# Altium PCB USBtoUART R.PcbDoc
Units mil, origin at the board's own origin, x right, y up, seen from the top; angles counter-clockwise.
Board outline 2125.98 x 2401.57 mil, 2 copper layers (Top Layer, Bottom Layer); 22 components, 17 nets, 100 pads, 8 vias.
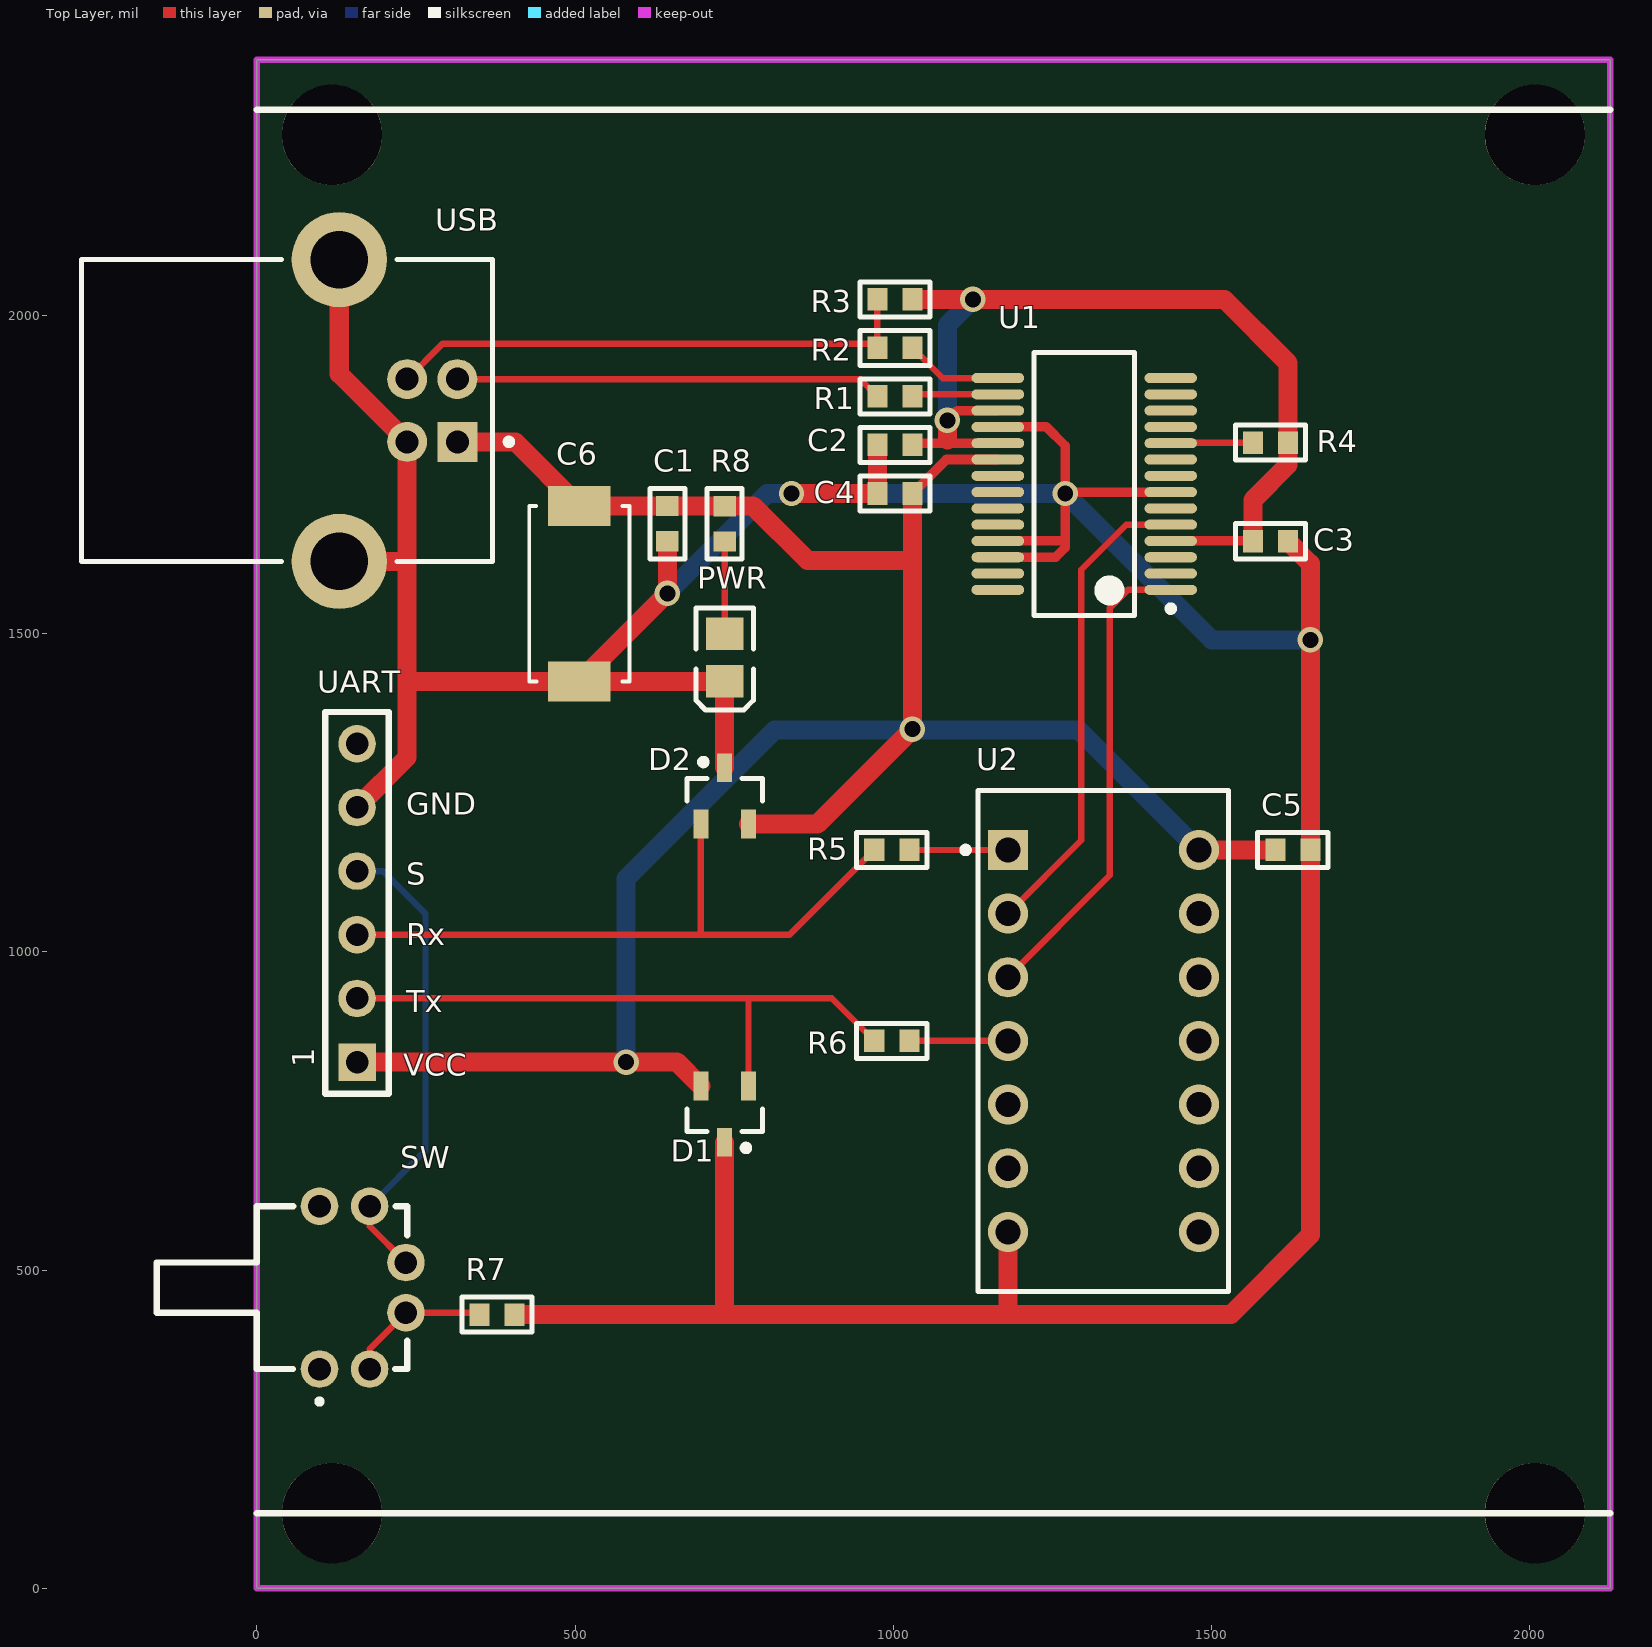
[diagram p0: Top Layer view]
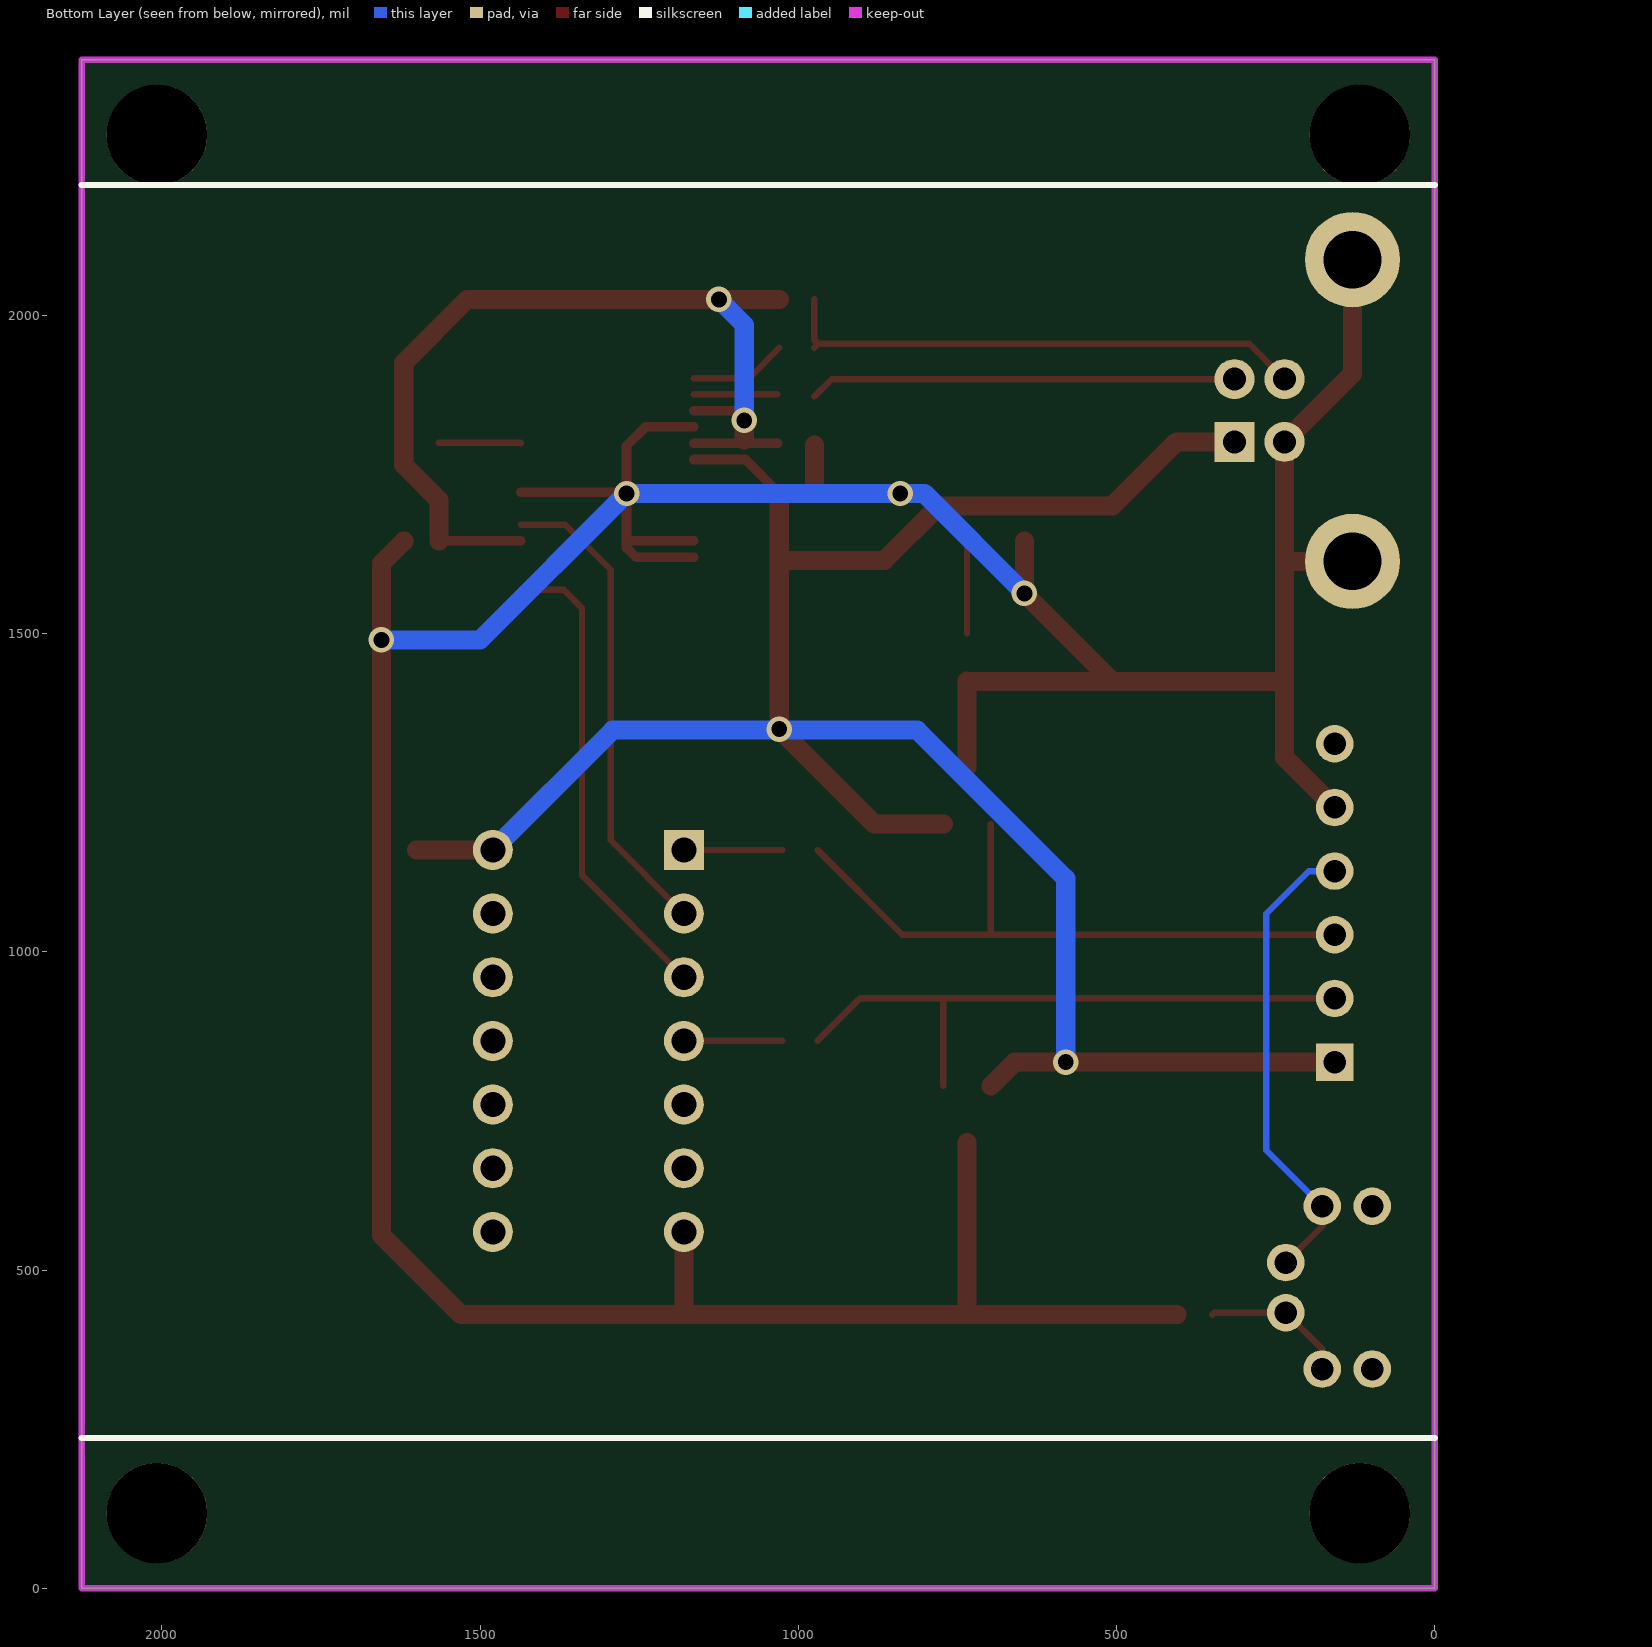
[diagram p1: Bottom Layer view, seen from below]

## Layer stack, top to bottom
Top Layer: signal copper 1.4
Dielectric: dielectric 12.6, FR-4, Dk 4.8
Bottom Layer: signal copper 1.4

## Board outline
0,0 0,2401.57 2125.98,2401.57 2125.98,0

## Design rules (kind name [scope] priority, off if disabled: settings)
Clearance [All] p1: gap=8
HoleSize [All] p1: absolutevalues=TRUE maxlimit=200 minlimit=1 maxpercent=80.000 minpercent=20.000
MinimumSolderMaskSliver [All] p1: minsoldermaskwidth=1
PolygonConnect [All] p1: connectstyle=Relief reliefconductorwidth=10 reliefentries=4 polygonreliefangle="90 Angle"
RoutingVias [All] p1: holewidth=28 width=50 viastyle="Through Hole" minholewidth=10 minwidth=20 maxholewidth=28 maxwidth=50
SilkToSilkClearance [All] p1: silktosilkclearance=5
SilkscreenOverComponentPads [All] p1: minsilkscreentomaskgap=0
SolderMaskExpansion [All] p1: expansion=4
Width [All] p1: maxlimit=100 minlimit=10 preferedwidth=10
24 further rules are at their usual default settings.

## Components (designator, comment, footprint, x,y, rotation, side; value= is the part's Value field where it differs from the comment)
C1 "0.1uF" 0603INCH_1608MM 645,1645 r90 top
C2 "0.1uF" 0603INCH_1608MM 974.88,1796.25 r0 top
C3 "0.1uF" 0603INCH_1608MM 1620,1645 r180 top
C4 "0.1uF" 0603INCH_1608MM 1030,1720 r180 top
C5 "0.1uF" 0603INCH_1608MM 1600,1160 r0 top
C6 "10uF" 7343-CAP 510,1575 r270 top
D1 "BAT64-04" SOT23_N 735,745 r270 top
D2 "BAT64-04" SOT23_N 735,1245 r90 top
PWR "LED" "LED 0805" 735,1500 r270 top
R1 "22R" 0603INCH_1608MM 1030,1872.5 r180 top
R2 "22R" 0603INCH_1608MM 1030,1948.75 r180 top
R3 "1.5K" 0603INCH_1608MM 974.88,2025 r0 top
R4 "4.7K" 0603INCH_1608MM 1620,1800 r180 top
R5 "22R" 0603INCH_1608MM 970,1160 r0 top
R6 "22R" 0603INCH_1608MM 970,860 r0 top
R7 "200R" 0603INCH_1608MM 405,430 r180 top
R8 "1K" 0603INCH_1608MM 735,1700 r270 top
SW "SW" SW_ZS 98.43,472.44 r90 top locked
U1 "PL2303HXD" SOP65P780-28BN 1300,1735 r180 top
U2 "SN74LS14N" PDIP_14PIN 1330,860 r0 top
UART "DP6" Pin6_2.54mm 157.48,826.77 r90 top locked
USB "USB" USB2.5-2H4D 275.59,1850.39 r180 top locked

## Footprints (in the part's own frame and the unit in brackets; to place one, negate y for a bottom-side part, rotate by r counter-clockwise, add the part's x,y. Pads: shape width x height; smd on the part's side, far side on the other; paste and mask are expansions set on the pad)
0603INCH_1608MM [mm]
  rect 0.8x0.9 smd: 1(0,0) 2(1.4,0)
  silkscreen extent -0.7,-0.7 2.1,0.7, body extent -0.03,-0.46 1.47,0.46, height 0.5
7343-CAP [mm]
  rect 1.6x2.5 smd: 1(-3.186,-0.083) 2(3.814,-0.083)
  silkscreen extent -3.19,-2.08 3.81,1.92
"LED 0805" [mm]
  rect 1.3x1.5 smd: A(0,0) K(1.905,0)
  silkscreen extent -1.02,-1.15 3.05,1.15, body extent -0.13,-0.76 2.03,0.76, height 1
PDIP_14PIN [mm] "W7.62mm"
  rect 1.6x1.6 hole 1: 1(-3.81,7.62)
  round 1.6 hole 1: 2(-3.81,5.08) 3(-3.81,2.54) 4(-3.81,0) 5(-3.81,-2.54) 6(-3.81,-5.08) 7(-3.81,-7.62) 8(3.81,-7.62) 9(3.81,-5.08) 10(3.81,-2.54) 11(3.81,0) 12(3.81,2.54) 13(3.81,5.08) 14(3.81,7.62)
  silkscreen extent -5.62,-10 5,10, body extent -3.81,-9.78 3.81,9.88, height 2
Pin6_2.54mm [mm]
  rect 1.5x1.5 hole 0.9: 1(0,0)
  round 1.5 hole 0.9: 2(2.54,0) 3(5.08,0) 4(7.62,0) 5(10.16,0) 6(12.7,0)
  silkscreen extent -1.27,-1.27 13.97,1.27, body extent -1.02,-1.02 13.72,1.02, height 8
SOP65P780-28BN [mm] "SOP, 28-Leads, Body 10.2x5.3mm, Pitch 0.65mm, IPC Medium Density"
  oval 2.1x0.4 smd: 1(-3.45,4.225) 2(-3.45,3.575) 3(-3.45,2.925) 4(-3.45,2.275) 5(-3.45,1.625) 6(-3.45,0.975) 7(-3.45,0.325) 8(-3.45,-0.325) 9(-3.45,-0.975) 10(-3.45,-1.625) 11(-3.45,-2.275) 12(-3.45,-2.925) 13(-3.45,-3.575) 14(-3.45,-4.225) 15(3.45,-4.225) 16(3.45,-3.575) 17(3.45,-2.925) 18(3.45,-2.275) 19(3.45,-1.625) 20(3.45,-0.975) 21(3.45,-0.325) 22(3.45,0.325) 23(3.45,0.975) 24(3.45,1.625) 25(3.45,2.275) 26(3.45,2.925) 27(3.45,3.575) 28(3.45,4.225)
  silkscreen extent -3.57,-5.25 2,5.25, body extent -2.8,-5.25 2.8,5.25, height 2
SOT23_N [mm]
  rect 1.15x0.6 smd: 1(1.125,0) 2(-1.125,-0.95) 3(-1.125,0.95)
  silkscreen extent -0.2,-1.5 1.47,1.5, body extent -1.04,-1.47 1.14,1.4, height 0.6
SW_ZS [mm] "body 5.8mm*5.8mm; LEN 10mm"
  round 1.5 hole 0.9: 1(-3.25,0) 2(-3.25,-2) 3(3.25,0) 4(3.25,-2) 5(-1,-3.45) 6(1,-3.45)
  silkscreen extent -4.63,-3.5 3.25,6.5, body extent -3.12,-3.33 3.1,6.35, height 5.8
USB2.5-2H4D [mm] "Connector; USB1.1, Type B, Thru-Hole; 4 Position; Right Angle"
  rect 1.6x1.6 hole 0.92: 1(-1,1.25)
  round 1.6 hole 0.92: 2(-1,-1.25) 3(1,-1.25) 4(1,1.25)
  round 3.8 hole 2.3: 5(3.71,6.02) 6(3.71,-6.02)
  silkscreen extent -3.18,-6.02 13.99,6.02, body extent -2.41,-6.02 13.99,6.02, height 11.1

## Part data
C1 C2 C3 C4 C5: library part Cap
C6: library part Cap_Pol
R1 R2 R3 R4 R5 R6 R7 R8: library part Res
SW: library part SW_zs5.8
U2: library part 74HC14D

## Free pads (board coordinates)
  round 157.48 hole 157.48: 0(118.11,118.11) 0(118.11,2283.46) 0(2007.87,118.11) 0(2007.87,2283.46)

## Via types
v1: diameter 40, hole 25, Top Layer to Bottom Layer, 8 vias

## Nets (pads, with @x,y where several pads share a name; then routed paths per layer and width w, separated by ;. In a path a pad name is that pad's centre, name@x,y a point inside that pad or via, vN(x,y) a via of type N, cw(c..) or ccw(c..) an arc to the next point about the centre after c; other vN are vias at no path point)
3V3: C2.2 C3.2 R3.2 R4.1 U1.4 U1.17 U1.19 | length 1517.5
  Top Layer w15: C2.2@1032.73,1798.98 U1.19 ; v1(1085,1835) 1100.16,1850.16 U1.17 ; U1.4 C3.2@1564.45,1645.43 ; C3.2 C3.2@1564.88,1645.27
  Top Layer w30: R3.2 v1(1125,2025) 1520,2025 1620,1925 R4.1 1620,1765 1564.88,1709.88 C3.2@1564.88,1645.27 ; 1085,1803.89 v1(1085,1835)
  Bottom Layer w30: v1(1085,1835) 1085,1985 v1(1125,2025)
5V: C1.2 C4.1 C5.1 C6.1 D1.2 D2.2 R8.1 U1.20 U2.14 UART.1 USB.1 | length 3676.4
  Top Layer w15: C4.1 1083.39,1773.39 U1.20
  Top Layer w30: UART.1 v1(580,826.77) 660.12,826.77 D1.2 ; USB.1 405.98,1801.18 C6.1 779.57,1700.43 865,1615 1030,1615 ; D2.2 880.71,1200.71 v1(1030,1350) C4.1 ; U2.14 C5.1
  Bottom Layer w30: v1(580,826.77) 580,1115 813.31,1348.31 1291.69,1348.31 U2.14
DM: R1.2 USB.2 | length 671.1
  Top Layer w10: USB.2 947.78,1899.61 R1.2
DP: R2.2 R3.1 USB.3 | length 836.8
  Top Layer w10: USB.3 291.61,1955 R2.2@968.63,1955 ; R2.2 R2.2@968.63,1955 ; R3.1 974.88,1961.25 R2.2@968.63,1955
GND: C1.1 C2.1 C3.1 C4.2 C5.2 C6.2 D1.1 D2.1 PWR.K R7.1 U1.7 U1.18 U1.25 U1.26 U2.7 UART.5 USB.4 USB.5 USB.6 | length 6793.1
  Top Layer w15: U1.26 1254.84,1619.84 1270,1635 v1(1270,1720) 1270,1795 1240.43,1824.57 U1.18 ; U1.25 1265.43,1645.43 ; v1@1272.2,1722.2 U1.7
  Top Layer w30: USB.5 234.61,1613.39 ; USB.6 129.53,1907.87 USB.4 236.22,1424.84 ; UART.5 236.22,1305.51 236.22,1424.84 ; R7.1 735,430 ; C1.1 v1(645,1563.11) C6.2 ; D1.1 735,430 ; D2.1 PWR.K 734.84,1424.84 C6.2 ; v1(840,1720) C4.2 C2.1 ; 1180,435 U2.7 ; C3.1 1655.12,1609.88 v1(1655.12,1490) C5.2 1655.12,555.12 1530,430 735,430 ; 236.22,1424.84 C6.2
  Bottom Layer w30: v1(645,1563.11) 801.89,1720 v1(840,1720) v1(1270,1720) 1500,1490 v1(1655.12,1490)
NetPWR_A: PWR.A R8.2 | length 144.9
  Top Layer w10: PWR.A R8.2
NetR1_1: R1.1 U1.16 | length 130.9
  Top Layer w10: R1.1@1033.25,1875.75 U1.16
NetR2_1: R2.1 U1.15 | length 153.8
  Top Layer w10: R2.1 1077.41,1901.34 U1.15
NetR4_2: R4.2 U1.10 | length 129.5
  Top Layer w10: U1.10 1436.85,1800 R4.2
NetR5_2: R5.2 U2.1 | length 154.9
  Top Layer w10: R5.2 U2.1
NetR6_2: R6.2 U2.4 | length 154.9
  Top Layer w10: R6.2 U2.4
NetR7_2: R7.2 SW.2 SW.5 | length 229.1
  Top Layer w10: SW.2 177.17,375.98 SW.5 346.81,433.07 R7.2
NetSW_4: SW.4 SW.6 UART.4 | length 754.1
  Top Layer w10: SW.4 177.17,568.9 SW.6
  Bottom Layer w10: UART.4@168.23,1126.77 UART.4 198.23,1126.77 265,1060 265,688.23 SW.4
RX: D2.3 R5.1 UART.3 | length 1039
  Top Layer w10: UART.3 836.77,1026.77 R5.1 ; 697.6,1029.37 D2.3
RXD: U1.5 U2.2 | length 757.9
  Top Layer w10: U2.2 1295,1175 1295,1600 1366.02,1671.02 U1.5
TX: D1.3 R6.1 UART.2 | length 975.3
  Top Layer w10: UART.2 903.23,926.77 R6.1 ; D1.3 772.4,924.37
TXD: U1.1 U2.3 | length 754
  Top Layer w10: U2.3 1340,1120 1340,1540 1368.66,1568.66 U1.1
pads on no net: SW.1 SW.3 U1.2 U1.3 U1.6 U1.8 U1.9 U1.11 U1.12 U1.13 U1.14 U1.21 U1.22 U1.23 U1.24 U1.27 U1.28 U2.5 U2.6 U2.8 U2.9 U2.10 U2.11 U2.12 U2.13 UART.6

## Keep-outs
Keep-Out Layer:
  the board outline again, w10

## Silkscreen, mask and mechanical layers (free items; w line width, h text height)
Top Overlay:
  lines w10: 0,118.11 2125.98,118.11 ; 0,2322.83 2125.98,2322.83
  text "GND" at 235,1215 h35
  text "S" at 235,1105 h35
  text "Rx" at 235,1010 h35
  text "Tx" at 235,905 h35
  text "VCC" at 230,805 h35
Bottom Overlay:
  lines w10: 0,236.22 2125.98,236.22 ; 0,2204.72 2125.98,2204.72

## Text inside footprints (layer, text, board x,y; h text height)
UART: Top Overlay "1" at 90.55,818.9 h35 r90